# Altium PCB PowerSupply.PcbDoc
Units mm, origin at the board's own origin, x right, y up, seen from the top; angles counter-clockwise.
Board outline 13.84 x 18.16 mm, 2 copper layers (Top Layer, Bottom Layer); 4 components, 3 nets, 19 pads, 0 vias.
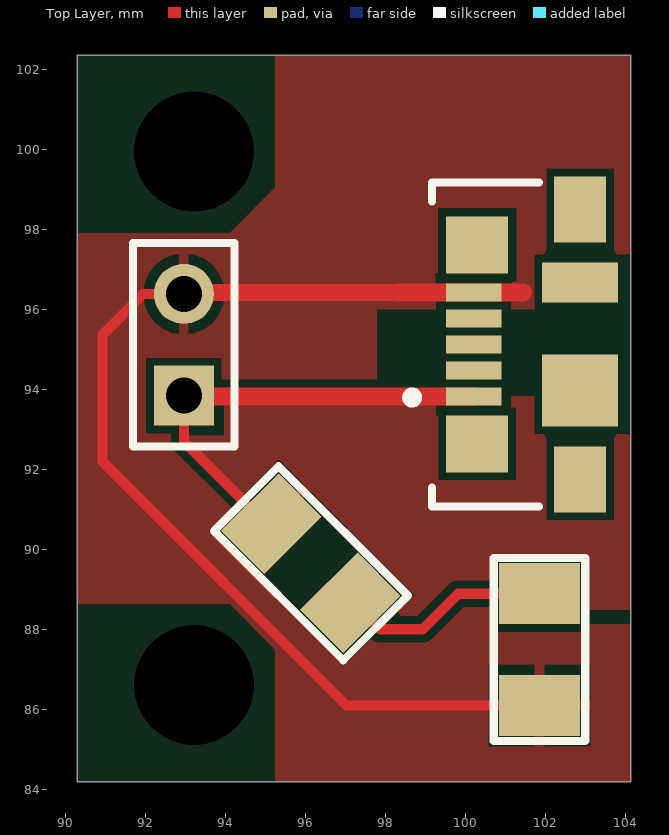
[diagram p0: Top Layer view]
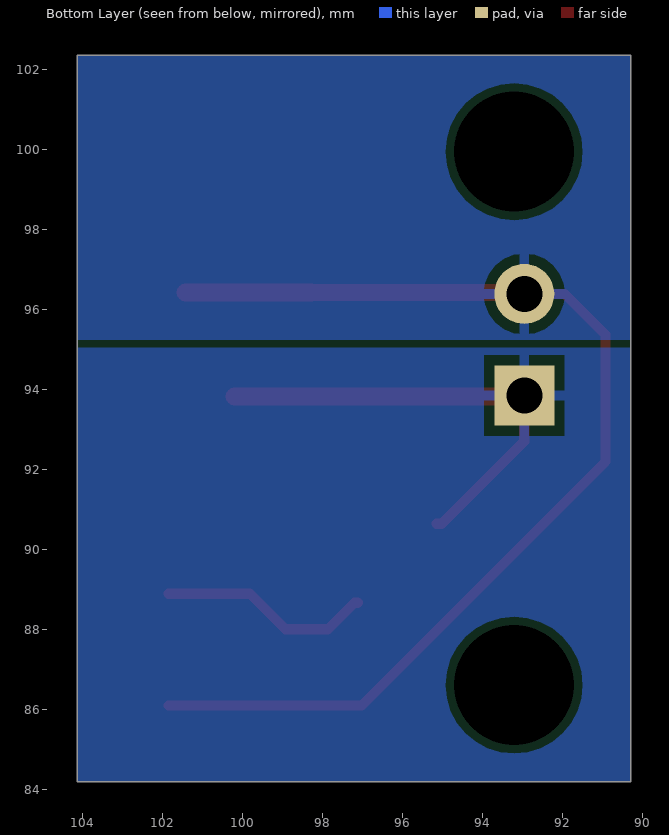
[diagram p1: Bottom Layer view, seen from below]
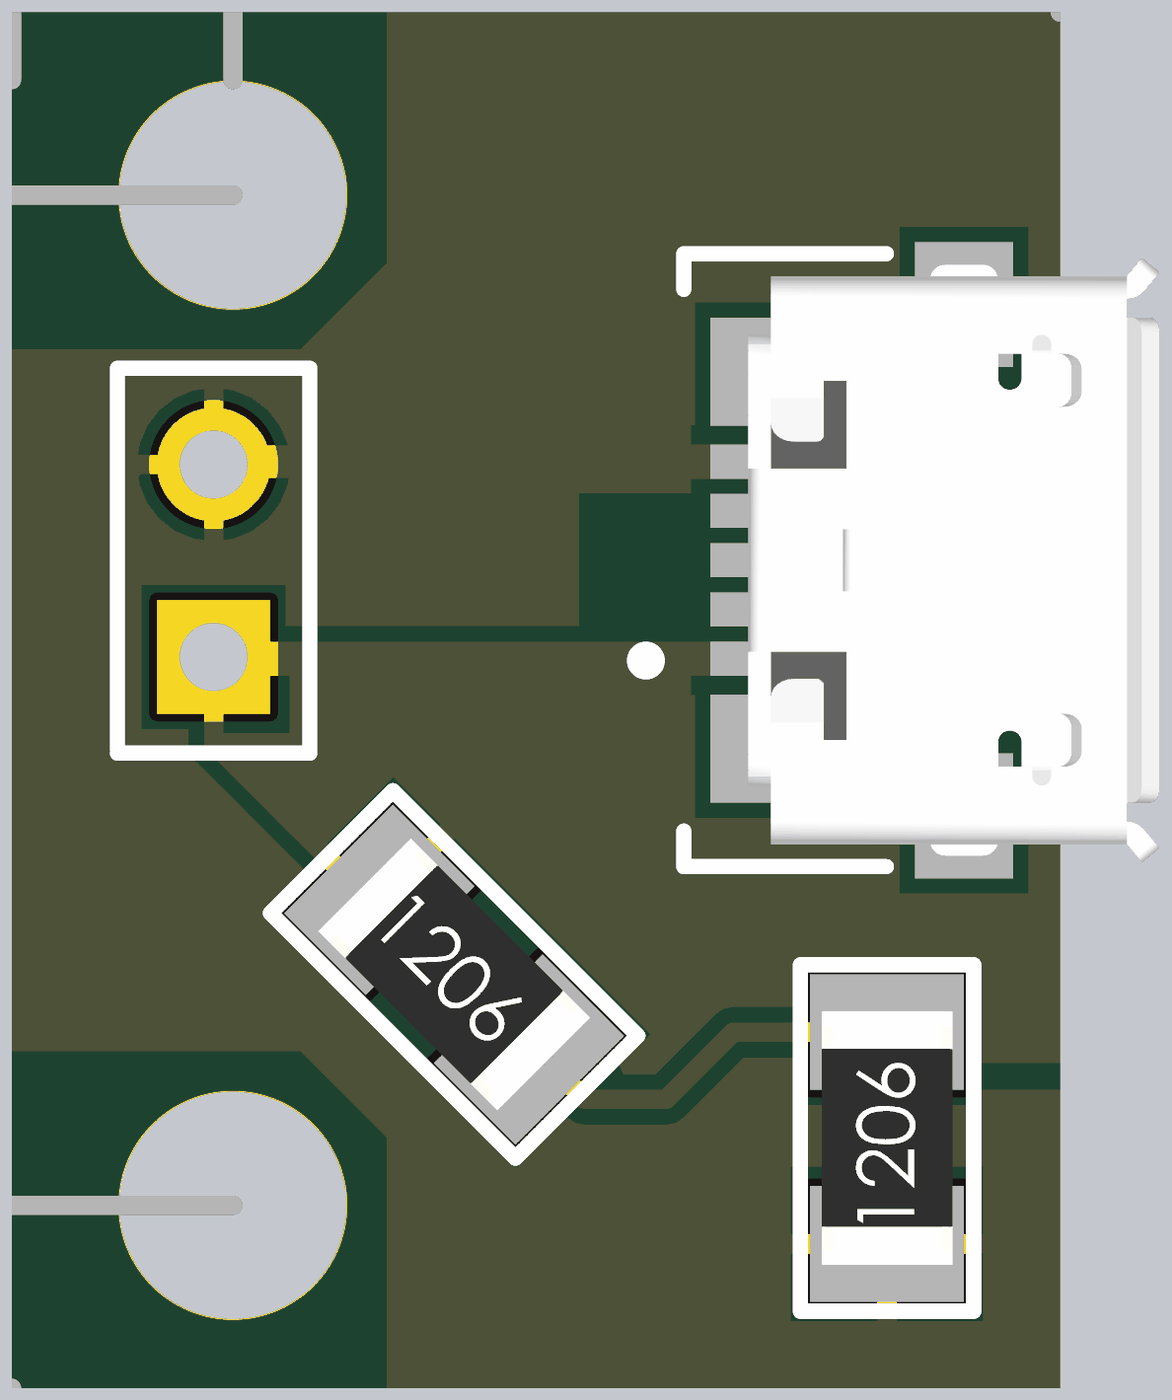
[diagram p2: 3D render of the assembled board from above, using the file's embedded part models]

## Layer stack, top to bottom
Top Solder: solder mask 0.0102, Solder Resist, Dk 3.5
Top Layer: signal copper 0.0356
Dielectric 1: dielectric 0.32, FR-4, Dk 4.8
Bottom Layer: signal copper 0.0356
Bottom Solder: solder mask 0.0102, Solder Resist, Dk 3.5

## Board outline
90.297,84.201 104.14,84.201 104.14,102.362 90.297,102.362

## Design rules (kind name [scope] priority, off if disabled: settings)
Clearance [All] p1: gap=0.2 ignorepadtopadclearanceinfootprint=FALSE except(0.3: Arc-Hole Track-Hole)
PlaneClearance [All] p1: clearance=0.6
PolygonConnect [All] p1: connectstyle=Relief reliefconductorwidth=0.254 reliefentries=4 polygonreliefangle="90 Angle" airgapwidth=0.254
RoutingVias [All] p1: holewidth=0.711 width=1.27 viastyle="Through Hole" minholewidth=0.711 minwidth=1.27 maxholewidth=0.711 maxwidth=1.27
SolderMaskExpansion [All] p1: expansion=0.102 istentingtop=FALSE
Width [All] p1: maxlimit=0.5 minlimit=0.254 preferedwidth=0.254
29 further rules are at their usual default settings.

## Components (designator, comment, footprint, x,y, rotation, side; value= is the part's Value field where it differs from the comment)
outPS "Header 2" HDR1X2 92.964,93.853 r90 top
PSInputMicroUSB "473460001" Molex_0_MFG 102.52,95.13 r90 top
R "470" SMD-1206-RES 96.139,89.662 r225 top
SLED "LED" SMD-1206-RES 101.854,87.503 r0 top

## Footprints (in the part's own frame and the unit in brackets; to place one, negate y for a bottom-side part, rotate by r counter-clockwise, add the part's x,y. Pads: shape width x height; smd on the part's side, far side on the other; paste and mask are expansions set on the pad)
HDR1X2 [mm] "Connector; Header; 2 Position"
  rect 1.5x1.5 hole 0.9: 1(0,0)
  round 1.5 hole 0.9: 2(2.54,0)
  silkscreen extent -1.27,-1.27 3.81,1.27
Molex_0_MFG [mm]
  rect 0.45x1.38 smd paste+0 mask+0: 1(-1.3,2.31) 2(-0.65,2.31) 3(0,2.31) 4(0.65,2.31) 5(1.3,2.31)
  rect 1.425x1.55 smd paste+0 mask+0: 6(-2.488,2.225) 7(2.487,2.225)
  rect 1.65x1.3 smd paste+0 mask+0: 8(-3.375,-0.35) 11(3.375,-0.35)
  rect 1.8x1.9 smd paste+0 mask+0: 9(-1.15,-0.35)
  rect 1x1.9 smd paste+0 mask+0: 10(1.55,-0.35)
  silkscreen extent -4.04,0.67 4.05,3.97, body extent -4.3,-2.48 4.3,3.45, height 0.25
SMD-1206-RES [mil]
  rect 80x60 smd: 1(0,55) 2(0,-55)
  silkscreen extent -45,-90 45,90, body extent -34,-66 34,66, height 33

## Part data
outPS: "Header, 2-Pin", LatestRevisionDate=17-Jul-2002, LatestRevisionNote="Re-released for DXP Platform.", Publisher="Altium Limited"
PSInputMicroUSB: "USB - micro B USB 2.0 Receptacle Connector 5 Position Surface Mount, Right Angle", Current Rating=1.8A, Digikey Part Number=WM17141CT-ND, Manufacturer=Molex, Mouser Part Number=538-47346-0001, Package=0, Temperature="-30°C to +85°C", Temperature Range High=+85°C, Temperature Range Low=-30°C, Voltage Rating=30V, Automotive=No, ComponentLink1Description=Upverter, ComponentLink1URL=https://upverter.com/part/id/076311b223d23811/, ComponentLink2Description=Datasheet, ComponentLink2URL=https://www.molex.com/webdocs/datasheets/pdf/en-us/0473460001_IO_CONNECTORS.pdf, Conn Orientation="Right Angle", Contact Material=Gold,Nickel, Datasheet Path=datasheets/Conn_Molex_473460001_eec.pdf, Digikey Description="CONN RCPT USB2.0 MICRO B SMD R/A", Footprint Url=https://www.molex.com/pdm_docs/sd/473460001_sd.pdf, Height=2.945mm, helpURL=https://upverter.com/part/id/076311b223d23811/, Is Female=yes, Lead Free=Yes, Number Of Contacts=5, Part Number=473460001, Pitch=0.65mm, RoHS=TRUE, Shielding=true, Supplier 1=Digi-Key, Supplier 2=Mouser, Supplier Part Number 1=WM17141CT-ND, Supplier Part Number 2=538-47346-0001, Symbol Hash=53ae1f1d9b557310b43ca686e5bb76a4a0c306152f4c27f7b0a2433b37067702, Usb Standard="USB 2.0", Verification Version=0.0.0.3
R: library part ERJ-8GEYJ471V, "RES SMD 470 OHM 5% 1/4W 1206", Digi-Key Part Number=P470ECT-ND, Manufacturer="Panasonic Electronic Components", Operating Temperature="-55°C ~ 155°C", Package / Case="1206 (3216 Metric)", Power (Watts)="0.25W, 1/4W", Supplier Device Package=1206, Temperature Coefficient=±200ppm/°C, Tolerance=±5%, @ qty=1500, Composition="Thick Film", Datasheets=http://industrial.panasonic.com/www-cgi/jvcr13pz.cgi?E+PZ+3+AOA0001+ERJ8GEYJ471V+7+WW, Factory Stock=0, Failure Rate=-, Features="Automotive AEC-Q200", Height - Seated (Max)="0.028\" (0.70mm)", Image=//media.digikey.com/Renders/Panasonic%20Renders/ERJ-1206%20Pkg.jpg, Minimum Quantity=1, Number of Terminations=2, Packaging="Cut Tape (CT)", Part Number=ERJ-8GEYJ471V, Part Status=Active, Quantity Available=509215, Series=ERJ, Size / Dimension="0.126\" L x 0.063\" W (3.20mm x 1.60mm)", Unit Price (USD)=0.00700
SLED: "*"

## Free pads (board coordinates)
  round 2 hole 3: 1(93.218,99.949) 2(93.218,86.614)

## Nets (pads, with @x,y where several pads share a name; then routed paths per layer and width w, separated by ;. In a path a pad name is that pad's centre, name@x,y a point inside that pad or via, vN(x,y) a via of type N, cw(c..) or ccw(c..) an arc to the next point about the centre after c; other vN are vias at no path point)
GND: outPS.2 PSInputMicroUSB.5 SLED.2 | length 27.6
  Top Layer w0.254: outPS.2 91.948,96.393 90.932,95.377 90.932,92.202 97.028,86.106 SLED.2 ; 101.436,96.43 101.473,96.393
  Top Layer w0.43: outPS.2 93.001,96.43 98.298,96.43
  Top Layer w0.45: 98.298,96.43 PSInputMicroUSB.5 101.436,96.43
NetR_1: R.1 SLED.1 | length 5.4
  Top Layer w0.254: R.1 97.207,88.674 97.87,88.011 98.933,88.011 99.822,88.9 SLED.1
VCC: outPS.1 PSInputMicroUSB.1 R.2 | length 11.4
  Top Layer w0.254: outPS.1@92.987,93.83 outPS.1 92.964,92.71 95.024,90.65 R.2
  Top Layer w0.45: outPS.1@92.987,93.83 PSInputMicroUSB.1
pads on no net: PSInputMicroUSB.2 PSInputMicroUSB.3 PSInputMicroUSB.4 PSInputMicroUSB.6 PSInputMicroUSB.7 PSInputMicroUSB.8 PSInputMicroUSB.9 PSInputMicroUSB.10 PSInputMicroUSB.11

## Polygon pours and split planes (outlines as drawn)
GND on Top Layer "GND_L01_P007" (solid, remove dead copper, pour order 7): 92.802,92.745 94.386,91.161 94.386,89.764 96.301,87.849 98.935,87.849 99.662,88.646 100.785,88.646 100.891,88.138 104.14,88.138 104.14,84.201 90.297,84.201 90.297,102.362 104.14,102.362 104.14,94.082 92.964,94.082 92.802,93.92
VCC on Top Layer "VCC_L01_P006" (solid, remove dead copper, pour order 6): 92.964,92.71 94.844,90.83 97.434,88.24 99.162,88.24 99.822,88.9 100.78,88.9 101.187,88.494 104.14,88.494 104.14,93.83 92.964,93.83
GND on Bottom Layer "GND_L02_P009" (solid, remove dead copper, pour order 9): 90.297,95.25 104.14,95.25 104.14,102.362 90.297,102.362
VCC on Bottom Layer "VCC_L02_P008" (solid, remove dead copper, pour order 8): 90.297,84.201 90.297,95.06 104.14,95.06 104.14,84.201

## Other copper
Top Layer:
  pour cut-out: 104.14,96.012 97.79,96.012 97.79,94.234 104.14,94.234
  pour cut-out: 94.898,89.183 96.97,87.111 98.728,88.869 96.656,90.941
  pour cut-out: 90.297,84.201 95.25,84.201 95.25,87.503 94.107,88.646 90.297,88.646
  pour cut-out: 90.297,102.362 95.25,102.362 95.25,99.06 94.107,97.917 90.297,97.917

## Silkscreen, mask and mechanical layers (free items; w line width, h text height)
Drill Drawing:
  lines w2.032: 89.281,84.201 ccw(c90.297,84.201) 90.297,83.185 ; 89.281,84.201 ccw(c90.297,84.201) 90.297,83.185 ; 89.281,84.201 89.281,102.362 ; 89.281,102.362 cw(c90.297,102.362) 90.297,103.378 ; 89.281,102.362 cw(c90.297,102.362) 90.297,103.378 ; 90.297,83.185 104.14,83.185 ; 90.297,103.378 104.14,103.378 ; 104.14,83.185 ccw(c104.14,84.201) 105.156,84.201 ; 104.14,83.185 ccw(c104.14,84.201) 105.156,84.201 ; 104.14,103.378 cw(c104.14,102.362) 105.156,102.362 ; 104.14,103.378 cw(c104.14,102.362) 105.156,102.362 ; 105.156,84.201 105.156,102.362

## Dimensions
93.218,101.473 to 90.297,102.616 on Top Paste
93.218,99.949 to 93.218,86.614 on Top Paste
90.297,102.362 to 90.297,84.201 on Top Paste
90.297,102.362 to 104.14,102.362 on Top Paste